# Altium PCB UltraZohm_ADC.PcbDoc (part 2 of 2)
Units mm, origin at the board's own origin, x right, y up, seen from the top; angles counter-clockwise.
Board outline 156.27 x 100.35 mm, 4 copper layers (Top Layer, GND, VCC, Bottom Layer), stack 0.778 mm thick; 243 components, 229 nets, 634 pads, 24 vias.
Unrouted connection lines stored in the file: 471.
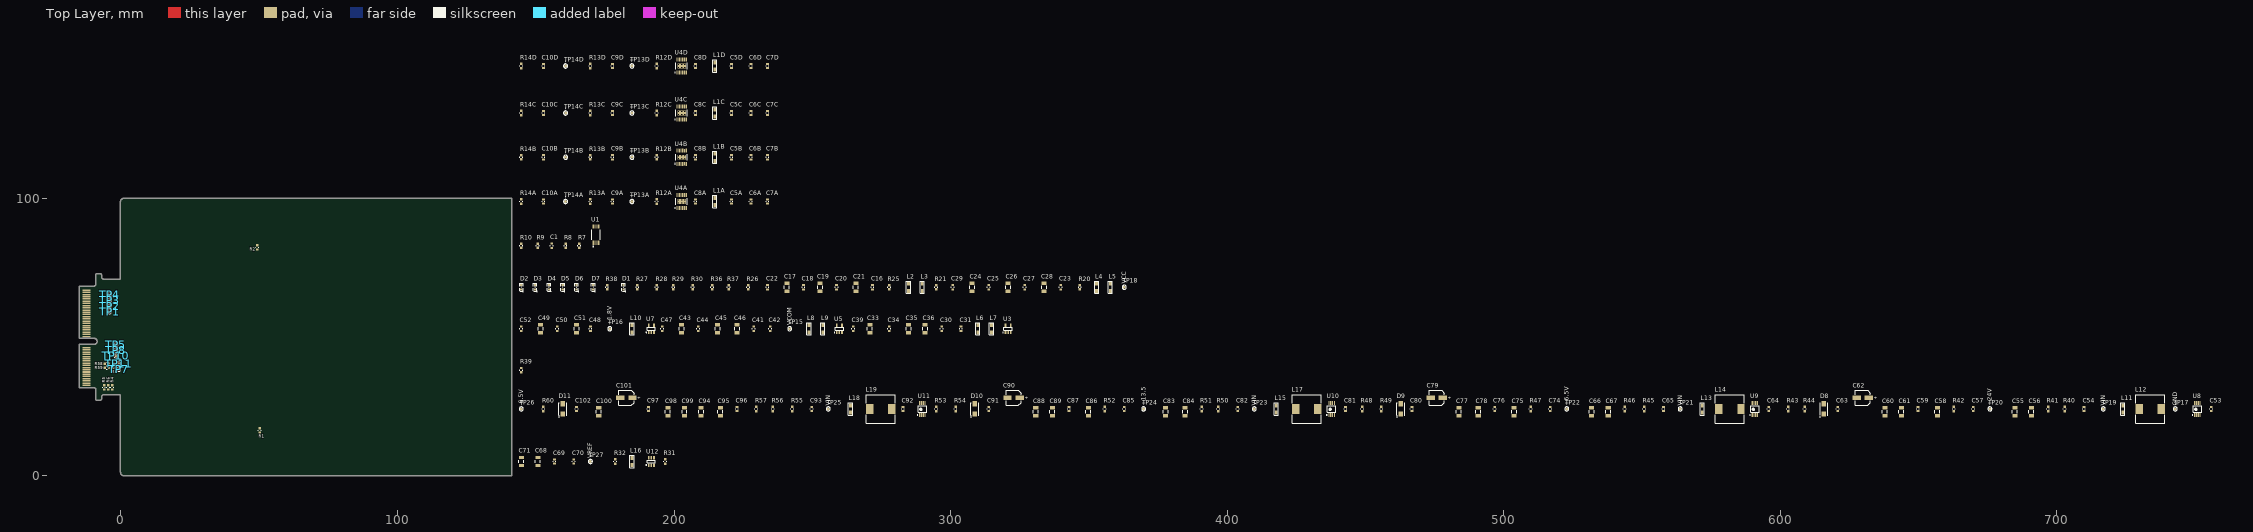
[diagram p0: Top Layer view]

## Via types
v1: diameter 0.5, hole 0.2, Top Layer to Bottom Layer, 24 vias

## Nets (pads, with @x,y where several pads share a name; then routed paths per layer and width w, separated by ;. In a path a pad name is that pad's centre, name@x,y a point inside that pad or via, vN(x,y) a via of type N, cw(c..) or ccw(c..) an arc to the next point about the centre after c; other vN are vias at no path point) (continued)
SDA_B: 
SW_N: C92.1 D11.1 L19.1 R56.2 U11.1
SW_P: C53.2 C64.2 C81.2 D8.1 D9.1 D10.1 L12.1 L14.1 L17.1 R41.1 R46.1 R51.1 U8.1 U9.1 U10.1
VCC: C5A.1 C5B.1 C5C.1 C5D.1 C6A.1 C6B.1 C6C.1 C6D.1 C27.2 C28.2 L5.2 R4.1 R31.1 R39.1 TP18.1 U4A.4 U4B.4 U4C.4 U4D.4
VCC-: C20.2 C21.2 L3.2
VCC_1.8V: C49.2 C50.1 L10.2 U7.1 U7.3
VCC_2.5V: C43.2 C44.1 L8.2 U5.1 U5.3
VCC_5.25V: C24.2 C25.1 L4.2
VCC_5V: C33.2 C34.1 L6.2 U3.1 U3.3
VCC_N: C102.1 U11.7
VDDA: 
VIN: L11.1 L13.1 L15.1 L18.1 R27.2 R32.1 X1.5 X1.6
VIN_VREF: C68.2 C69.1 L16.2 U12.4
VOCMA: 
VOCMB: 
VOCMC: 
VOCMD: 
VREF: C70.1 C71.2 L1A.2 L1B.2 L1C.2 L1D.2 TP27.1 U12.6
VSNA: 
VSNB: 
VSNC: 
VSND: 
VSOPA: 
VSOPB: 
VSOPC: 
VSOPD: 
VSPA: 
VSPB: 
VSPC: 
VSPD: 
pads on no net: U12.3 U12.5 X1.9 X1.10 X1.13 X1.14 X1.55 X1.59 X1.60 X1.61 X1.62 X1.65 X1.66 X1.67 X1.68 X1.71 X1.72 X1.73 X1.74 X1.77

## Dimensions
138,5.5 to 138,94.5 on Mechanical 2

## Text inside footprints (layer, text, board x,y; h text height)
C62: Top Overlay "+" at 633.791,27.512 h1.22
C79: Top Overlay "+" at 479.791,27.512 h1.22
C90: Top Overlay "+" at 326.791,27.512 h1.22
C101: Top Overlay "+" at 186.791,27.512 h1.22